# EAGLE board wsjt_lpf (EAGLE 9.6.2)
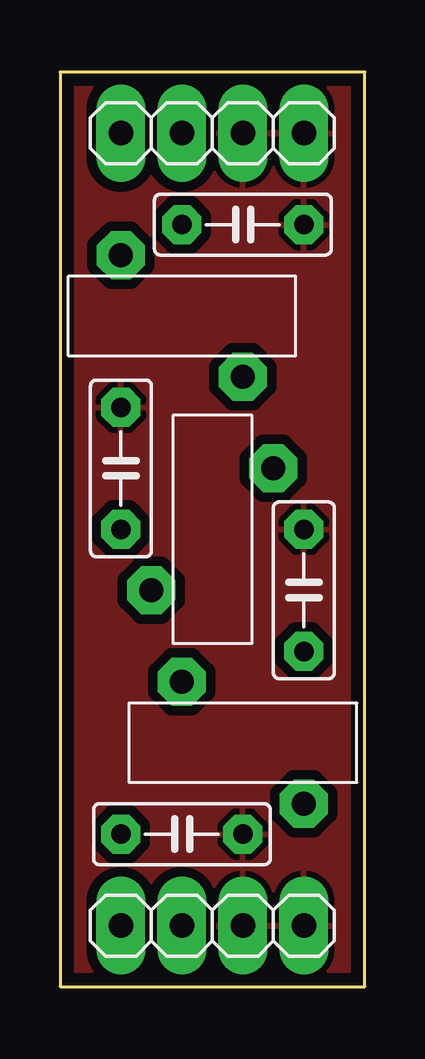
[diagram p0: board, top side]
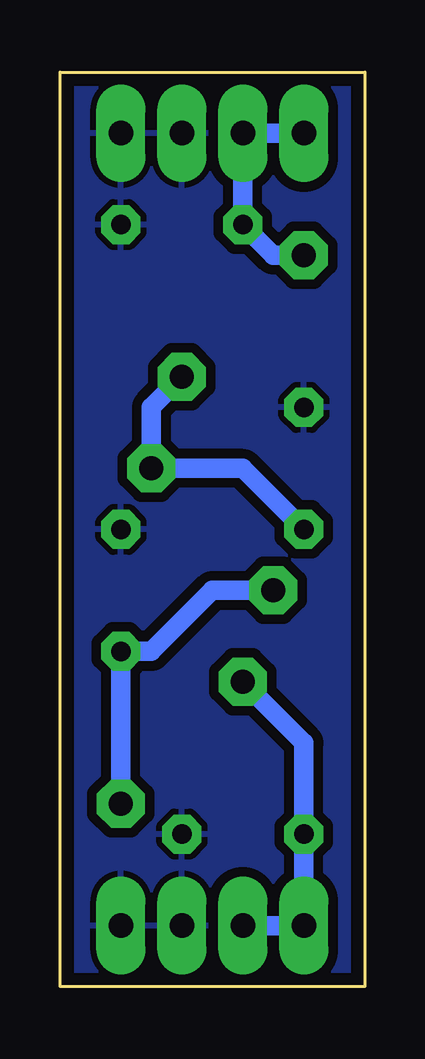
[diagram p1: board, bottom side, seen from below]

Size 12.7 x 38.1 mm. Coordinates in mm from the lower left corner, seen from the top.
Outline: 0,0 12.7,0 12.7,38.1 0,38.1 0,0
Copper layers (1*16): Top 0.035mm / dielectric 1.5mm / Bottom 0.035mm
Design rules "default *": minimum track width 6mil, minimum drill 0.35mm, track to track 6mil, track to pad 6mil, pad to pad 6mil, via to via 6mil, smd to smd 6mil, copper to edge 20mil, drill to drill 6mil, minimum pad ring 10mil, minimum via ring 8mil, stop-mask expansion 4mil, vias tented up to drill 0mil, thermal gap 10mil

## Footprints (pad centres in the part's own frame; a part is rotated, then mirrored left to right if it is on the bottom)
1X04 = drill 1.016 long: 1 -3.81,0; 2 -1.27,0; 3 1.27,0; 4 3.81,0
C050-025X075 = drill 0.813 octagon: 1 -2.54,0; 2 2.54,0
T37-6 = drill 1 octagon: P$1 -2.54,-2.54; P$2 2.54,2.54

## Placement (x,y rotation side)
E$1  [1X04]  6.35,2.54 0 top
E$2  [1X04]  6.35,35.56 0 top
E$3  [C050-025X075]  5.08,6.35 0 top
E$4  [C050-025X075]  10.16,16.51 90 top
E$5  [C050-025X075]  2.54,21.59 90 top
E$6  [C050-025X075]  7.62,31.75 0 top
E$7  [T37-6]  7.62,10.16 90 top
E$8  [T37-6]  6.35,19.05 180 top
E$9  [T37-6]  5.08,27.94 90 top

## Library data of the parts
E$1 E$2 = pinhead
E$3-E$6 = rcl
E$7-E$9 = WSJT

## Nets
GND: E$1.3 E$1.4 E$2.3 E$2.4 E$3.2 E$4.2 E$5.2 E$6.2
S$1: E$1.1 E$1.2 E$3.1 E$7.P$2
S$2: E$4.1 E$7.P$1 E$8.P$2
S$4: E$2.1 E$2.2 E$6.1 E$9.P$2
S$5: E$5.1 E$8.P$1 E$9.P$1

## Tracks (layer width: path | path; a pad name or v marks a point on that pad's centre or on a via)
GND
  pour Top (isolate 0.406): 0,0 12.7,0 12.7,38.1 0,38.1
  pour Bottom (isolate 0.406): 0,0 12.7,0 12.7,38.1 0,38.1
S$1
  Bottom 0.813: E$1.2 E$1.1 E$3.1 2.54,10.16 E$7.P$2
S$2
  Bottom 0.813: E$7.P$1 E$4.1 8.89,13.97 6.35,16.51 E$8.P$2
S$4
  Bottom 0.813: E$2.1 E$2.2 E$6.1 3.81,30.48 E$9.P$2
S$5
  Bottom 0.813: E$5.1 5.08,21.59 E$8.P$1 8.89,24.13 E$9.P$1